# EAGLE board testPCB (EAGLE 9.6.2)
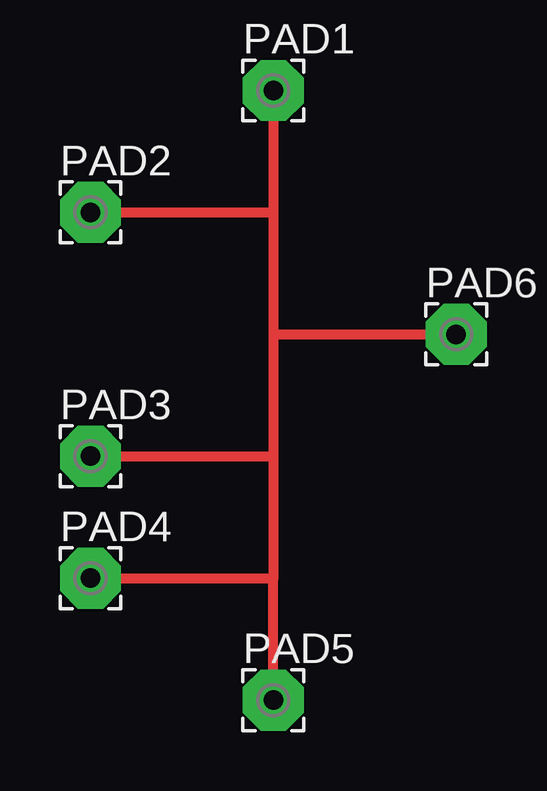
[diagram p0: board, top side]

No outline drawn. Coordinates in mm, seen from the top.
Copper layers (1*16): Top 0.035mm / dielectric 1.5mm / Bottom 0.035mm
Design rules "default": minimum track width 6mil, minimum drill 0.35mm, track to track 6mil, track to pad 6mil, pad to pad 6mil, via to via 6mil, smd to smd 6mil, copper to edge 40mil, drill to drill 6mil, minimum pad ring 10mil, minimum via ring 8mil, stop-mask expansion 4mil, vias tented up to drill 0mil, thermal gap 10mil

## Footprints (pad centres in the part's own frame; a part is rotated, then mirrored left to right if it is on the bottom)
2,54/0,8 = drill 0.813 pad 2.54 octagon: 1 0,0

## Placement (x,y rotation side)
PAD1  [2,54/0,8]  7.62,25.4 0 top
PAD2  [2,54/0,8]  0,20.32 0 top
PAD3  [2,54/0,8]  0,10.16 0 top
PAD4  [2,54/0,8]  0,5.08 0 top
PAD5  [2,54/0,8]  7.62,0 0 top
PAD6  [2,54/0,8]  15.24,15.24 0 top

## Library data of the parts
PAD1-PAD6 = wirepad

## Nets
N$1: PAD1.1 PAD2.1 PAD3.1 PAD4.1 PAD5.1 PAD6.1

## Tracks (layer width: path | path; a pad name or v marks a point on that pad's centre or on a via)
N$1
  Top 0.406: PAD1.1 7.62,20.32 | 7.62,20.32 7.62,15.24 | 7.62,15.24 PAD6.1 | 7.62,15.24 7.62,10.16 | 7.62,10.16 7.62,5.08 | PAD2.1 7.62,20.32 | PAD3.1 7.62,10.16 | PAD4.1 7.62,5.08 | PAD5.1 7.62,5.08